# EAGLE board RasPi7021 (EAGLE 6.4)
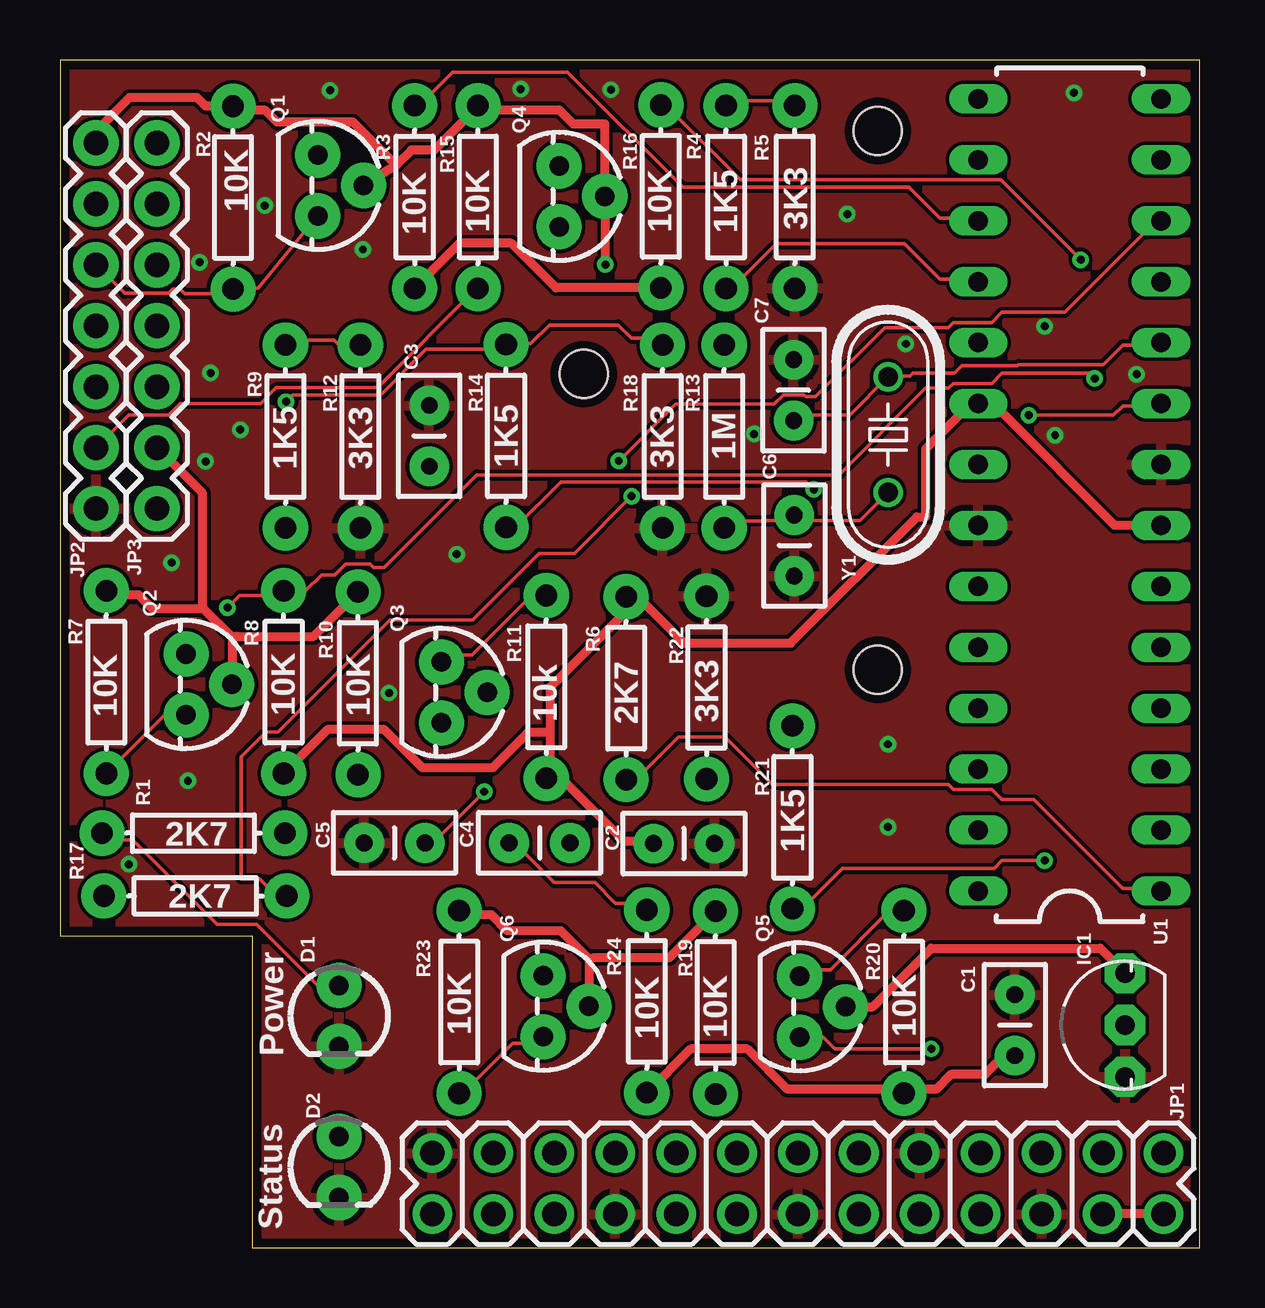
[diagram p0: board, top side]
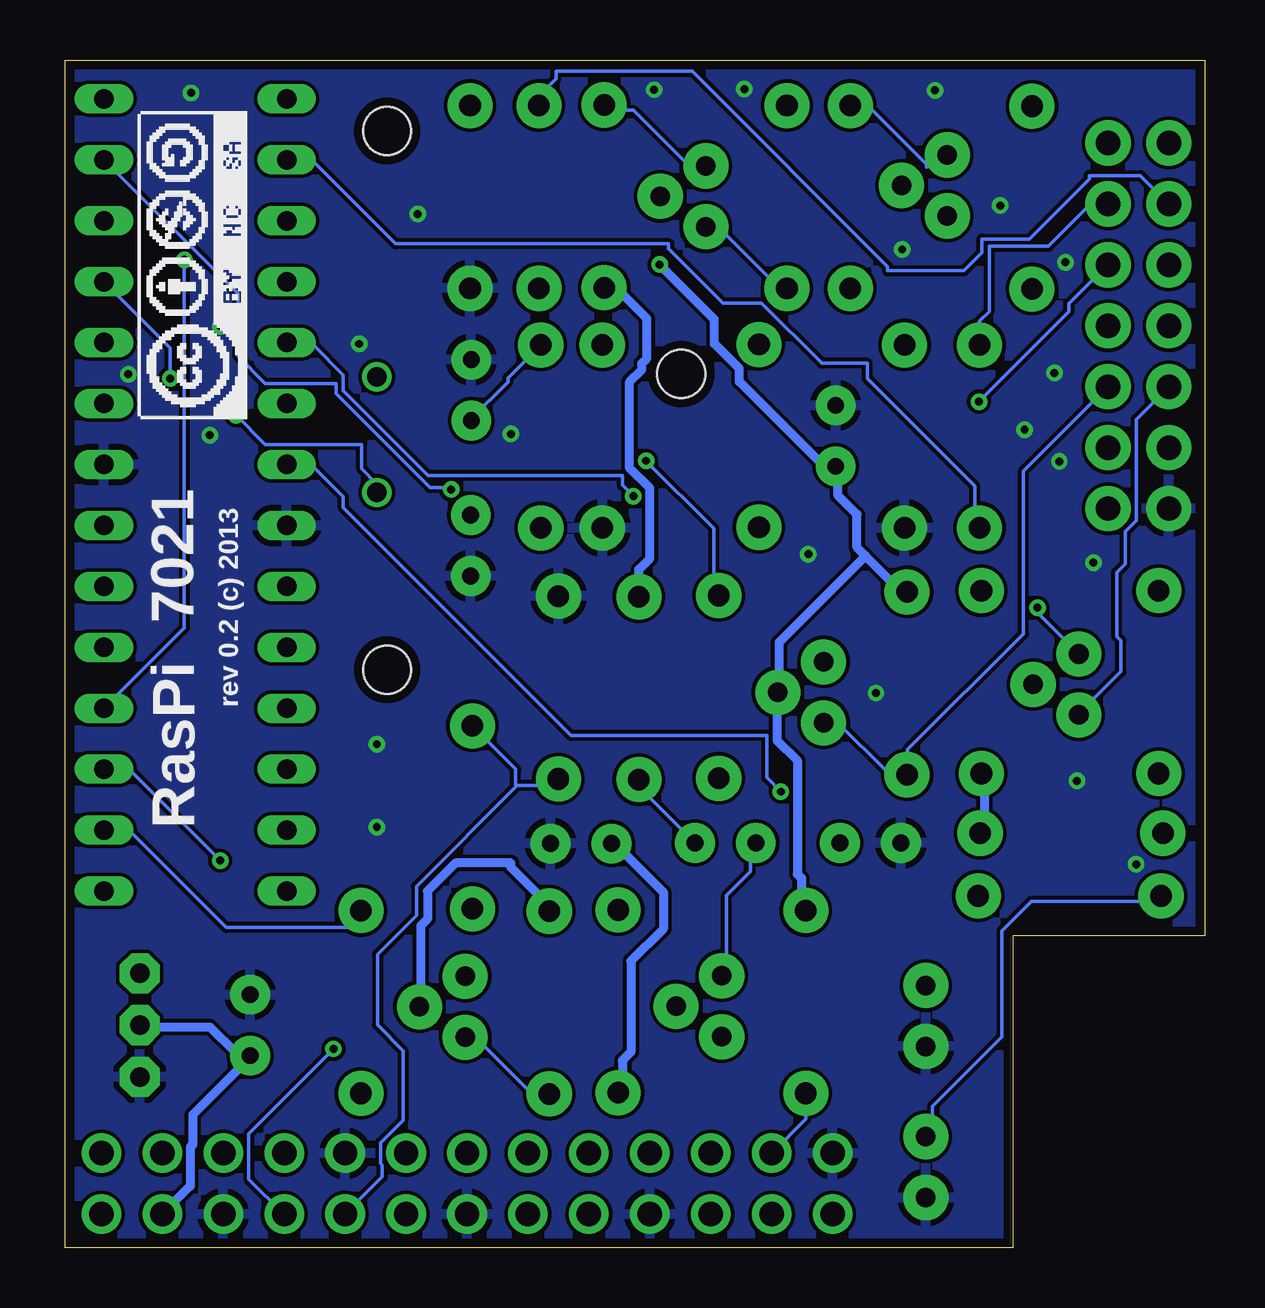
[diagram p1: board, bottom side, seen from below]

Size 47.5 x 49.5 mm. Coordinates in mm from the lower left corner, seen from the top.
Outline: 8,0 47.5,0 47.5,49.5 0,49.5 0,13 8,13 8,0
Copper layers (1*16): Top 0.0356mm / dielectric 1.5011mm / Bottom 0.0356mm
Design rules "LaenPCBOrder *": minimum track width 6mil, minimum drill 13mil, track to track 6mil, track to pad 6mil, pad to pad 6mil, via to via 6mil, smd to smd 6mil, copper to edge 15mil, drill to drill 6mil, minimum pad ring 7mil, minimum via ring 7mil, stop-mask expansion 4mil, vias tented up to drill 15mil, thermal gap 10mil
Net classes: 1 pwr: width 0.381 mm
Holes 2 mm at 21.83,36.41 34.09,24.08 34.09,46.54

## Footprints (pad centres in the part's own frame; a part is rotated, then mirrored left to right if it is on the bottom)
CAP-PTH-SMALLEZ = drill 0.7 pad 1.651: 1 0,0; 2 2.54,0
LED3MM = drill 0.813 pad 1.88: A -1.27,0; K 1.27,0
TO92-INLINE = drill 0.813 pad 1.676 octagon: 1 -2.159,0; 2 0,0; 3 2.159,0
2X13 = drill 1.016 pad 1.651: 1 0,0; 2 0,2.54; 3 2.54,0; 4 2.54,2.54; 5 5.08,0; 6 5.08,2.54; 7 7.62,0; 8 7.62,2.54; 9 10.16,0; 10 10.16,2.54; 11 12.7,0; 12 12.7,2.54; 13 15.24,0; 14 15.24,2.54; 15 17.78,0; 16 17.78,2.54; 17 20.32,0; 18 20.32,2.54; 19 22.86,0; 20 22.86,2.54; 21 25.4,0; 22 25.4,2.54; 23 27.94,0; 24 27.94,2.54; 25 30.48,0; 26 30.48,2.54
1X07 = drill 1.016 pad 1.88: 1 0,0; 2 2.54,0; 3 5.08,0; 4 7.62,0; 5 10.16,0; 6 12.7,0; 7 15.24,0
TO-92 = drill 0.813 pad 1.88: 1 -1.27,0; 2 0,1.905; 3 1.27,0
AXIAL-0.3EZ = drill 0.9 pad 1.88: P$1 -3.81,0; P$2 3.81,0
DIL28-3 = drill 0.813 long: 1 -16.51,-3.81; 2 -13.97,-3.81; 3 -11.43,-3.81; 4 -8.89,-3.81; 5 -6.35,-3.81; 6 -3.81,-3.81; 7 -1.27,-3.81; 8 1.27,-3.81; 9 3.81,-3.81; 10 6.35,-3.81; 11 8.89,-3.81; 12 11.43,-3.81; 13 13.97,-3.81; 14 16.51,-3.81; 15 16.51,3.81; 16 13.97,3.81; 17 11.43,3.81; 18 8.89,3.81; 19 6.35,3.81; 20 3.81,3.81; 21 1.27,3.81; 22 -1.27,3.81; 23 -3.81,3.81; 24 -6.35,3.81; 25 -8.89,3.81; 26 -11.43,3.81; 27 -13.97,3.81; 28 -16.51,3.81
CRYSTAL_HC49/S = drill 0.813: 1 -2.413,0; 2 2.413,0

## Placement (x,y rotation side)
C1  100n  [CAP-PTH-SMALLEZ]  39.8,8 90 top
C2  1u  [CAP-PTH-SMALLEZ]  24.74,16.84 0 top
C3  100n  [CAP-PTH-SMALLEZ]  15.39,32.56 90 top
C4  27n  [CAP-PTH-SMALLEZ]  18.72,16.87 0 top
C5  27n  [CAP-PTH-SMALLEZ]  12.67,16.87 0 top
C6  30p  [CAP-PTH-SMALLEZ]  30.61,27.99 90 top
C7  30p  [CAP-PTH-SMALLEZ]  30.58,37.01 270 top
D1  [LED3MM]  11.63,9.65 270 top
D2  [LED3MM]  11.63,3.35 270 top
IC1  MCP1700  [TO92-INLINE]  44.4,9.27 90 top
JP1  M13X22X13  [2X13]  46,3.93 180 top
JP2  [1X07]  1.5,30.8 90 top
JP3  [1X07]  4.04,30.8 90 top
Q1  BS108  [TO-92]  10.74,44.27 270 top
Q2  BS108  [TO-92]  5.26,23.47 270 top
Q3  BS108  [TO-92]  15.9,23.14 270 top
Q4  BS108  [TO-92]  20.8,43.81 270 top
Q5  BS108  [TO-92]  30.84,10.03 270 top
Q6  BS108  [TO-92]  20.14,10.06 270 top
R1  2K7  [AXIAL-0.3EZ]  5.56,17.27 180 top
R2  10K  [AXIAL-0.3EZ]  7.21,43.76 270 top
R3  10K  [AXIAL-0.3EZ]  14.78,43.79 90 top
R4  1K5  [AXIAL-0.3EZ]  27.76,43.79 90 top
R5  3K3  [AXIAL-0.3EZ]  30.63,43.79 270 top
R6  2K7  [AXIAL-0.3EZ]  23.6,23.32 90 top
R7  10K  [AXIAL-0.3EZ]  1.93,23.57 270 top
R8  10K  [AXIAL-0.3EZ]  9.32,23.57 90 top
R9  1K5  [AXIAL-0.3EZ]  9.4,33.81 90 top
R10  10K  [AXIAL-0.3EZ]  12.42,23.52 270 top
R11  10k  [AXIAL-0.3EZ]  20.27,23.37 90 top
R12  3K3  [AXIAL-0.3EZ]  12.52,33.81 270 top
R13  1M  [AXIAL-0.3EZ]  27.69,33.81 90 top
R14  1K5  [AXIAL-0.3EZ]  18.59,33.83 90 top
R15  10K  [AXIAL-0.3EZ]  17.42,43.79 270 top
R16  10K  [AXIAL-0.3EZ]  25.04,43.81 90 top
R17  2K7  [AXIAL-0.3EZ]  5.64,14.66 180 top
R18  3K3  [AXIAL-0.3EZ]  25.12,33.81 270 top
R19  10K  [AXIAL-0.3EZ]  27.33,10.21 270 top
R20  10K  [AXIAL-0.3EZ]  35.18,10.24 90 top
R21  1K5  [AXIAL-0.3EZ]  30.53,17.93 90 top
R22  3K3  [AXIAL-0.3EZ]  26.95,23.34 90 top
R23  10K  [AXIAL-0.3EZ]  16.64,10.24 270 top
R24  10K  [AXIAL-0.3EZ]  24.46,10.26 90 top
U1  ATMEGA328P_PDIP  [DIL28-3]  42.09,31.37 90 top
Y1  16MHz  [CRYSTAL_HC49/S]  34.52,33.88 270 top

## Library data of the parts
C1-C7 = SparkFun-Capacitors
D1 D2 = SparkFun-LED
IC1 = adafruit
JP1-JP3 = SparkFun-Connectors
Q1-Q6 = SparkFun-DiscreteSemi
R1-R24 = SparkFun-Resistors
U1 = SparkFun-DigitalIC
Y1 = AIS_Mk2

## Nets
+3V3 [pwr]: C3.1 IC1.3 JP2.7 JP3.2 Q1.2 Q2.2 Q3.2 Q4.2 Q5.2 Q6.2 R2.P$1 R7.P$1 R10.P$1 R15.P$1 R19.P$1 R23.P$1
+5V [pwr]: C1.1 C2.1 IC1.2 JP1.2 JP1.4 R1.P$1 R3.P$1 R6.P$2 R8.P$1 R11.P$1 R16.P$1 R20.P$1 R24.P$1 U1.7 U1.20
CLK_OUT: JP2.2 Q4.3 R15.P$2
CLK_OUT_5: Q4.1 R16.P$2 U1.4
DAT_IN: JP3.3 Q3.3 R10.P$2
DAT_IN_5: Q3.1 R11.P$2 U1.12
DAT_OUT: JP2.3 Q2.3 R7.P$2
DAT_OUT_5: Q2.1 R8.P$2 U1.11
DTR: JP1.23 Q6.3 R23.P$2
DTR_5: C4.1 Q6.1 R24.P$2
GND [pwr]: C1.2 C2.2 C3.2 C5.1 C6.1 C7.1 D1.K D2.K IC1.1 JP1.6 JP1.9 JP1.14 JP1.20 JP1.25 JP2.1 R5.P$2 R12.P$2 R18.P$2 R22.P$2 U1.8 U1.22
N$1: R17.P$1 U1.19
N$2: D1.A R1.P$2
N$3: D2.A R17.P$2
N$8: C7.2 R13.P$2 U1.10 Y1.1
N$13: C6.2 R13.P$1 U1.9 Y1.2
N$24: JP3.1
N$31: C5.2 U1.21
N$33: JP3.4
N$36: JP3.7
N$40: JP2.4
RESET: C4.2 R6.P$1 U1.1
RXD: JP1.8 Q5.3 R19.P$2
RXD_5: Q5.1 R20.P$2 U1.2
SCLK: JP3.5 R14.P$2 R18.P$1
SCLK_5: R14.P$1 U1.13
SDATA: JP3.6 R9.P$2 R12.P$1
SDATA_5: R9.P$1 U1.16
SLE: JP2.6 R4.P$2 R5.P$1
SLE_5: R4.P$1 U1.18
SREAD: JP2.5 Q1.3 R2.P$2
SREAD_5: Q1.1 R3.P$2 U1.17
TXD: JP1.10 R21.P$2 R22.P$1
TXD_5: R21.P$1 U1.3

## Tracks (layer width: path | path; a pad name or v marks a point on that pad's centre or on a via)
+3V3  (via drill 0.33)
  Top 0.381: IC1.3 43.36,12.47 36.32,12.47 33.88,10.03 Q5.2 | R23.P$1 16.82,13.87 17.98,13.87 18.64,13.21 20.88,13.21 22.07,12.01 | 22.07,12.01 22.07,10.06 Q6.2 | R19.P$1 25.4,12.09 22.25,12.09 22.07,12.01 | JP2.7 1.52,46.05 1.52,46.79 1.75,46.79 2.9,47.93 5.71,47.93 6.07,47.57 R2.P$1 7.39,47.5 7.49,47.4 8.56,47.4 9.04,46.91 12.22,46.91 14.02,45.11 | 14.02,45.11 14.66,45.74 15.6,45.74 17.42,47.57 R15.P$1 17.53,47.42 20.8,47.42 21.39,46.84 22.71,46.84 Q4.2 22.73,43.64 v22.73,40.97 | 14.02,45.11 Q1.2 | R7.P$1 2.11,27.2 3.28,27.2 3.86,26.62 5.94,26.62 | 5.94,26.62 5.99,26.62 7.19,25.43 | 7.19,25.43 7.19,23.47 Q2.2 | 5.94,26.62 5.94,31.45 4.06,33.33 JP3.2 | R10.P$1 10.57,25.48 7.37,25.48 7.19,25.43
  Bottom 0.381: Q5.2 32.69,10.08 32.69,13.41 32.41,13.69 32.41,14.86 31.24,16.03 28.93,16.03 28.93,15.85 27.33,14.25 R19.P$1 | 14.15,28.83 12.65,27.33 R10.P$1 | 14.15,28.83 14.5,29.18 14.5,30.56 15.29,31.34 15.29,32.46 C3.1 15.47,32.16 19.41,36.09 19.41,36.63 20.45,37.67 20.45,38.68 v22.73,40.97 | 14.15,28.83 17.75,25.22 17.75,23.19 Q3.2 17.83,22.96 17.83,21.13 16.99,20.3 16.99,15.57 16.82,15.39 16.82,14.22 R23.P$1
+5V
  Top 0.381: JP1.4 43.48,1.4 JP1.2 | C1.1 39.34,8 38.56,7.21 37.13,7.21 36.52,6.6 35.36,6.6 R20.P$1 35.1,6.6 30.33,6.6 28.65,8.28 26.29,8.28 R24.P$1 | R3.P$1 16.66,41.86 18.82,41.86 20.68,40.01 R16.P$1 | U1.7 43.97,30.1 39.29,34.77 38.68,34.77 U1.20 38.1,35.1 37.77,34.77 37.57,34.77 36.09,33.3 36.09,30.45 35.71,30.45 30.45,25.2 26.01,25.2 24.31,26.9 23.77,26.9 R6.P$2 23.6,26.39 23.47,26.39 20.45,23.37 20.45,21.46 | C2.1 24.64,16.94 23.52,16.94 20.9,19.56 R11.P$1 20.45,19.74 20.45,21.46 | R8.P$1 11.15,21.59 13.51,21.59 15.11,19.99 18.03,19.99 19.51,21.46 20.45,21.46
  Bottom 0.381: IC1.2 44.4,9.2 41.48,9.2 40.41,8.13 40.41,8 C1.1 40.21,7.82 40.21,7.52 42.19,5.54 42.19,4.29 42.29,4.19 42.29,2.56 JP1.4 | R1.P$1 9.2,17.45 9.2,18.9 9.32,19.02 R8.P$1 | R16.P$1 24.31,40.01 24.31,39.75 23.27,38.71 23.27,37.06 23.47,36.85 23.47,36.6 23.98,36.09 23.98,32.49 23.14,31.65 23.14,28.73 23.6,28.27 R6.P$2 | R24.P$1 24.28,6.63 24.28,7.8 23.93,8.15 23.93,11.94 22.58,13.28 22.58,14.81 24.61,16.84 C2.1
CLK_OUT
  Top 0.152: R15.P$2 17.37,39.98 13.23,35.84 9.02,35.84 8.36,35.18 5,35.18 4.52,34.7 2.87,34.7 1.52,33.35 JP2.2
  Bottom 0.152: Q4.3 19.94,42.55 19.94,42.19 17.73,39.98 R15.P$2
CLK_OUT_5  (via drill 0.33)
  Top 0.152: v42.55,41.17 39.22,44.5 28.37,44.5 25.25,47.62 R16.P$2
  Bottom 0.152: U1.4 42.55,25.83 v42.55,41.17 | Q4.1 21.64,45.09 21.64,45.21 23.82,47.4 25.04,47.4 R16.P$2
DAT_IN
  Bottom 0.152: Q3.3 15.29,21.87 13.26,19.84 13.26,19.71 R10.P$2 12.39,19.76 12.39,20.75 7.57,25.58 7.57,32.36 4.06,35.87 JP3.3
DAT_IN_5  (via drill 0.33)
  Top 0.152: U1.12 45.36,42.27 45.16,42.27 41.88,38.99 39.27,38.99 38.84,38.56 37.24,38.56 37.03,38.35 34.39,38.35 31.5,35.46 31.09,35.46 31.01,35.53 30.15,35.53 29.77,35.15 25.65,35.15 v23.29,32.79 | Q3.1 16.18,24.69 17.17,24.69 19.66,27.18 R11.P$2
  Bottom 0.152: v23.29,32.79 20.47,29.97 20.47,27.38 R11.P$2
DAT_OUT
  Top 0.152: R7.P$2 4.37,22.2 Q2.3
  Bottom 0.152: Q2.3 5.26,22.25 3.5,24 3.5,25.3 3.68,25.48 3.68,28.14 3.33,28.5 3.33,29.84 2.87,30.3 2.87,34.52 1.52,35.87 JP2.3
DAT_OUT_5  (via drill 0.33)
  Top 0.152: v43.13,36.22 42.9,36.45 39.27,36.45 38.84,36.02 37.24,36.02 37.03,35.81 36.07,35.81 32.46,32.21 17.37,32.21 13.51,28.35 13.08,28.35 12.93,28.5 11.91,28.5 11.46,28.04 10.9,28.04 10.24,27.38 R8.P$2 9.12,27.18 7.49,27.18 v6.99,26.67
  Bottom 0.152: U1.11 43.13,37.49 v43.13,36.22 | Q2.1 6.99,26.47 v6.99,26.67
DTR
  Top 0.152: Q6.3 19.86,8.51 18.87,8.51 16.79,6.43 R23.P$2
  Bottom 0.152: R23.P$2 16.64,5.36 JP1.23
DTR_5
  Top 0.152: R24.P$2 24.18,14.35 23.16,14.35 22.3,15.21 20.6,15.21 18.95,16.87 C4.1
  Bottom 0.152: C4.1 18.95,16.64 18.95,15.67 19.94,14.68 19.94,11.53 Q6.1
GND  (via drill 0.33)
  other vias: 12.62,41.61 16.54,28.91 11.25,48.23 32.82,43.08 34.52,20.98 41.48,33.86 6.27,36.45 7.52,34.09 5.33,19.46 8.53,43.43 5.82,41.07 13.72,23.11 34.52,17.53 42.27,48.13 4.65,28.55 6.07,32.77 22.96,48.26 19.2,48.29 28.93,33.91 2.87,15.98 35.26,37.67 41.05,38.4 44.88,36.4
  pour Bottom: 0,49.5 47.5,49.5 47.5,0 8,0 8,13 0,13
  pour Top: 0,49.5 47.5,49.5 47.5,0 8,0 8,13 0,13
N$1  (via drill 0.33)
  Top 0.152: v23.82,31.32 21.44,28.93 19.96,28.93 17.2,26.16 13.77,26.16 9.09,21.49 8.59,21.49 7.54,20.45 7.54,15.37 8.33,15.37 9.04,14.66 R17.P$1
  Bottom 0.152: U1.19 37.13,37.72 37.13,37.59 35.92,36.37 35.92,35.71 32.38,32.18 24.28,32.18 24.28,31.77 v23.82,31.32
N$2
  Top 0.152: R1.P$2 2.03,16.99 3.02,16.99 6.55,13.46 8.2,13.46 10.74,10.92 D1.A
N$3
  Bottom 0.152: D2.A 11.35,4.9 11.35,5.89 8.46,8.79 8.46,13.21 7.24,14.43 1.83,14.43 R17.P$2
N$8
  Top 0.152: C7.2 30.81,34.7 32.92,34.7 Y1.1 34.57,36.32 35.43,36.32 35.56,36.45 37.29,36.45 37.59,36.75 39.9,36.75 39.95,36.8 43.48,36.8 44.3,37.62 45.8,37.62 U1.10
  Bottom 0.152: R13.P$2 29.06,36.25 29.06,36.07 30.58,34.54 C7.2
N$13  (via drill 0.33)
  Top 0.152: Y1.2 33.35,30.3 30.84,30.3 C6.2 30.73,30.3 29.44,30.3 29.41,30.28 27.96,30.28 R13.P$1 | U1.9 45.8,35.08 44.3,35.08 43.92,34.7 v40.39,34.7
  Bottom 0.152: v40.39,34.7 39.17,33.48 35.15,33.48 35.15,32.46 34.52,31.83 Y1.2
N$31  (via drill 0.33)
  Top 0.152: v17.68,19 15.54,16.87 C5.2
  Bottom 0.152: U1.21 37.13,32.64 37.13,32.51 35.92,31.29 35.92,30.84 26.42,21.34 18.26,21.34 18.26,19.58 v17.68,19
RESET
  Top 0.152: U1.1 45.8,14.96 44.3,14.96 40.59,18.67 39.27,18.67 38.84,19.1 37.24,19.1 37.03,19.3 29.69,19.3 27.71,21.29 25.78,21.29 24,19.51 R6.P$1
  Bottom 0.152: C4.2 23.6,19.2 R6.P$1
RXD  (via drill 0.33)
  Top 0.152: v36.32,8.28 32.31,8.28 31.83,8.76 Q5.3
  Bottom 0.152: v36.32,8.28 39.85,4.75 39.85,2.85 38.41,1.4 JP1.8 | R19.P$2 28.17,6.4 28.17,6.53 30.4,8.76 Q5.3
RXD_5
  Top 0.152: Q5.1 31.11,11.58 32.11,11.58 34.57,14.05 R20.P$2
  Bottom 0.152: U1.2 44.76,17.4 44.76,17.3 40.79,13.34 35.18,13.34 R20.P$2
SCLK  (via drill 0.33)
  Top 0.152: v9.42,35.26 9.7,35.53 13.36,35.53 15.27,37.44 18.39,37.44 R14.P$2 18.64,37.67 19.61,37.67 20.4,38.46 23.27,38.46 23.82,37.9 24.84,37.9 R18.P$1
  Bottom 0.152: v9.42,35.26 5.66,39.01 5.66,39.34 4.06,40.95 JP3.5
SCLK_5  (via drill 0.33)
  Top 0.152: v31.42,31.6 31.11,31.9 20.88,31.9 19,30.02 R14.P$1
  Bottom 0.152: U1.13 40.31,39.75 40.31,37.16 39.17,36.02 36.22,36.02 36.22,35.59 32.31,31.67 31.42,31.67 v31.42,31.6
SDATA
  Top 0.152: R9.P$2 9.6,37.82 11.43,37.82 11.63,37.62 R12.P$1
  Bottom 0.152: R9.P$2 9.4,38.61 8.99,39.01 8.99,41.73 6.53,41.73 4.9,43.36 4.9,43.48 4.06,43.48 JP3.6
SDATA_5
  Bottom 0.152: U1.16 37.13,45.34 37.13,45.24 33.73,41.83 22.35,41.83 22.35,41.63 20.09,39.37 18.49,39.37 15.98,36.85 14.07,36.85 14.07,36.22 9.6,31.75 9.6,30.2 R9.P$1
SLE
  Top 0.152: R5.P$1 30.43,47.8 27.96,47.8 R4.P$2
  Bottom 0.152: R4.P$2 27.76,48.01 27.05,48.72 27.05,49.02 21.36,49.02 13.23,40.89 13.23,40.72 10.06,40.72 9.3,41.48 9.3,42.04 7.32,42.04 4.83,44.53 4.83,44.68 2.69,44.68 1.52,43.51 JP2.6
SLE_5
  Top 0.152: U1.18 38.18,40.36 36.68,40.36 35.2,41.83 29.87,41.83 28.02,39.98 R4.P$1
SREAD
  Top 0.152: JP2.5 1.52,40.95 2.69,39.78 4.52,39.78 4.7,39.95 5,39.95 5.21,39.75 7.01,39.75 R2.P$2 7.26,39.98 8.26,39.98 Q1.3
SREAD_5
  Top 0.152: U1.17 38.18,42.9 36.68,42.9 35.38,44.2 25.96,44.2 21.16,49 16.36,49 14.96,47.6 R3.P$2
  Bottom 0.152: Q1.1 11.61,45.03 11.61,45.16 14.05,47.6 R3.P$2
TXD
  Bottom 0.152: 28.68,19.25 32.87,15.06 32.87,13.84 34.49,12.22 34.49,9.27 33.43,8.2 33.43,5.31 34.37,4.37 34.37,3.5 34.29,3.43 34.29,2.95 JP1.10 | 28.68,19.25 26.95,19.25 R22.P$1 | R21.P$2 28.73,19.94 28.73,19.3 28.68,19.25
TXD_5  (via drill 0.33)
  Top 0.152: v41.05,16.13 39.27,16.13 38.94,15.8 32.61,15.8 30.94,14.12 R21.P$1
  Bottom 0.152: U1.3 44.76,19.94 44.76,19.84 v41.05,16.13

## Text on the board
tNames: Power | Status
bNames: rev 0.2 (c) 2013 | 7021 | RasPi